# EAGLE board panel-icu-scu (EAGLE 9.3.2)
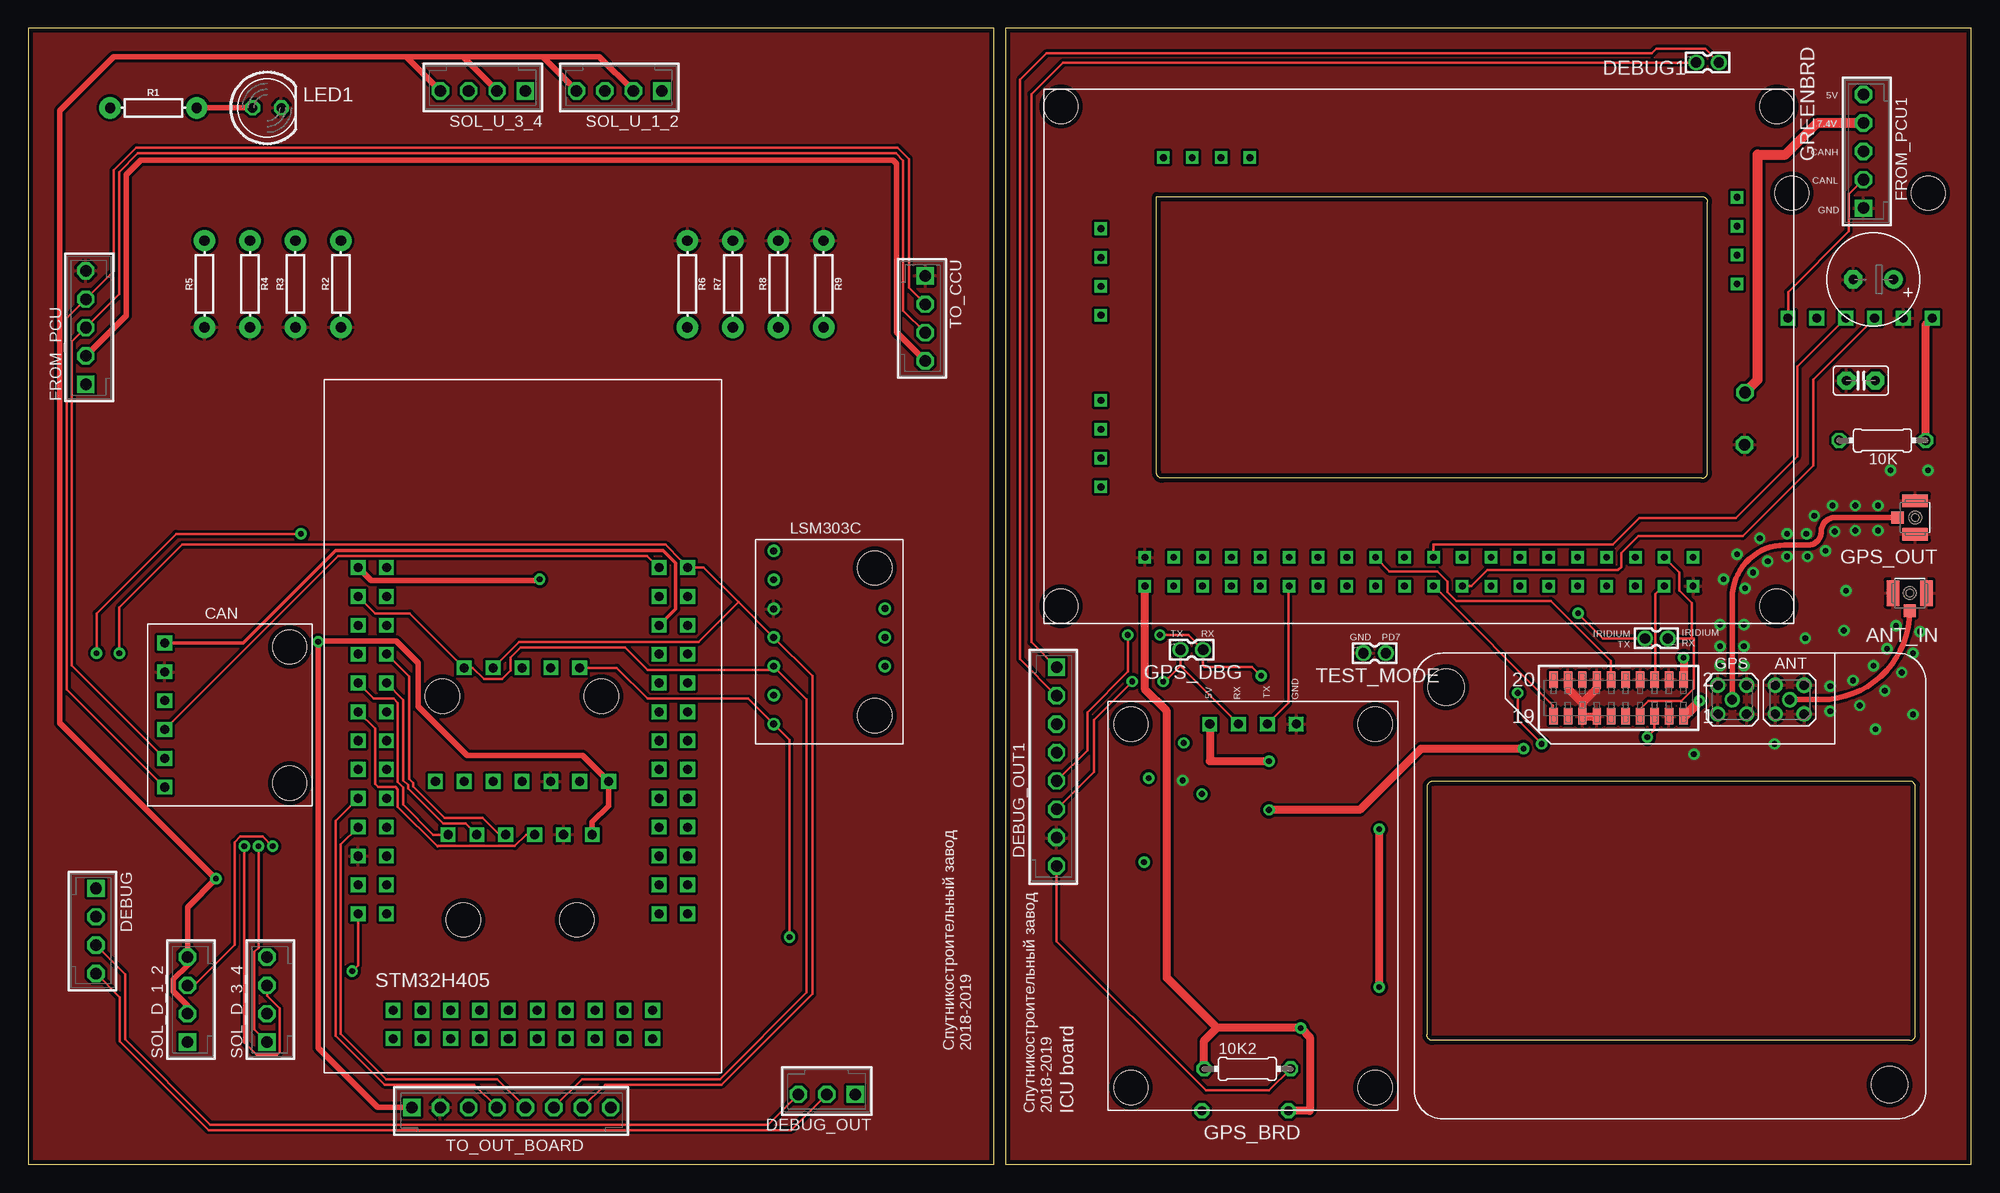
[diagram p0: board, top side]
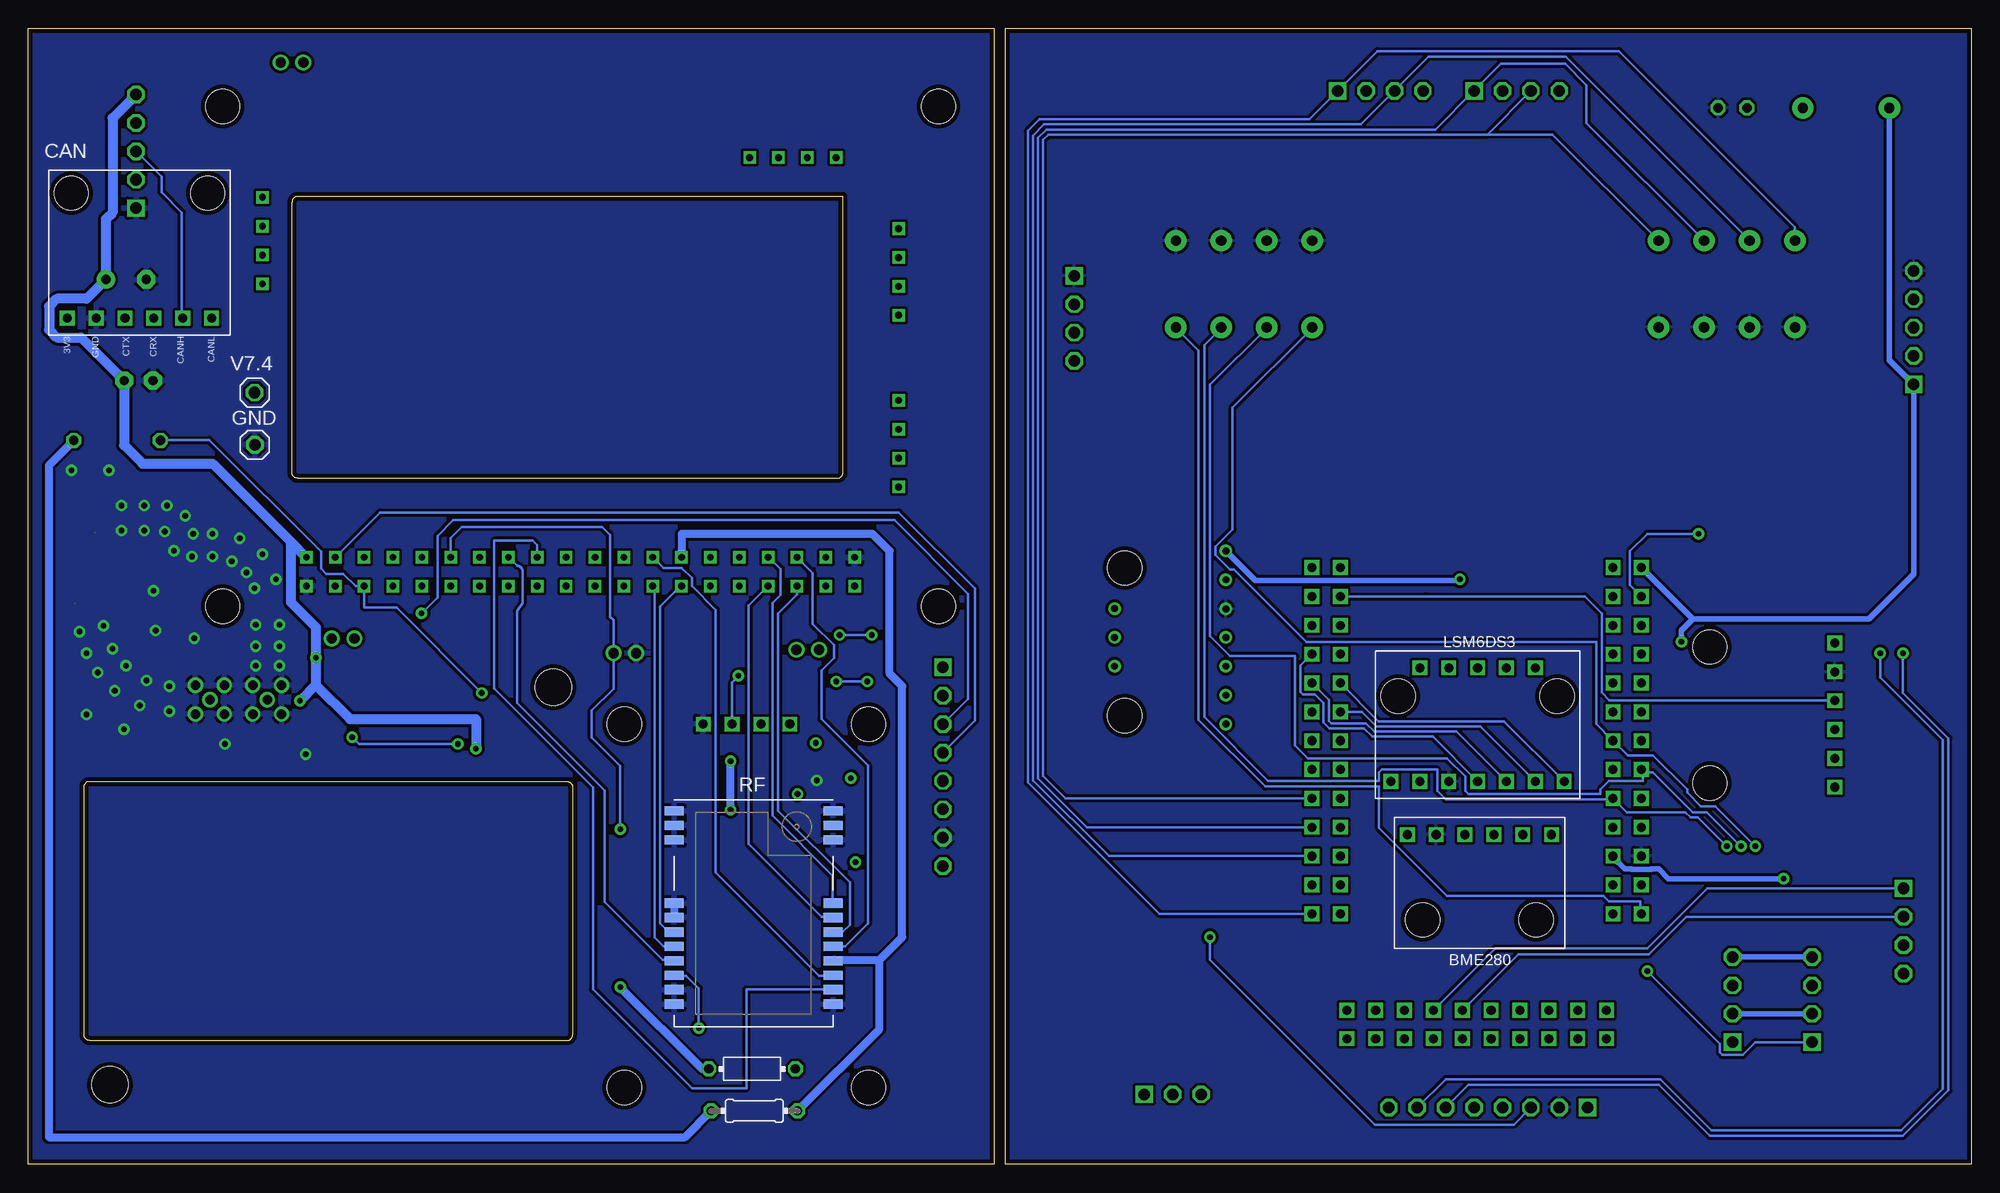
[diagram p1: board, bottom side, seen from below]

Size 171 x 100 mm. Coordinates in mm from the lower left corner, seen from the top.
Outline: 0,0 85,0 85,100 0,100 0,0
Outline: 86,0 171,0 171,100 86,100 86,0
Outline: 99.3,85.2 147.3,85.2 arc-90 147.8,84.7 147.8,60.9 arc-90 147.3,60.4 99.8,60.4 arc-90 99.3,60.9 99.3,85.2
Outline: 123.1,33.2 123.1,11.4 arc90 123.6,10.9 165.6,10.9 arc90 166.1,11.4 166.1,33.4 165.8,33.7 123.6,33.7 arc90 123.1,33.2
Copper layers (1*16): Top 0.035mm / dielectric 1mm / Bottom 0.035mm
Design rules "rezonit": minimum track width 0.2mm, minimum drill 0.5mm, track to track 0.25mm, track to pad 0.25mm, pad to pad 0.25mm, via to via 0.25mm, smd to smd 0.2mm, copper to edge 0.4mm, drill to drill 0.4mm, minimum pad ring 0.25mm, minimum via ring 0.25mm, stop-mask expansion 4mil, vias tented up to drill 0.6mm, thermal gap 10mil
Net classes: 0 default: width 0.2 mm, clearance 0.2 mm; 2 rf: width 0.5 mm, clearance 0.065 mm
Holes 3.2 mm at 124.8,42 163.8,7

## Footprints (pad centres in the part's own frame; a part is rotated, then mirrored left to right if it is on the bottom)
0204/7 = drill 0.813 octagon: 1 -3.81,0; 2 3.81,0
MMCX-P-P-X-ST-TH1 = drill 0.84 pad 1.3: 1 0,0; 2 -1.27,1.27; 3 -1.27,-1.27; 4 1.27,1.27; 5 1.27,-1.27
HRS_U.FL-R-SMT(01) = smd 1.1 x 2.25: 1 -1.475,0; 2 1.475,0 | smd 1.05 x 1.1: 3 0,-1.55
E3,5-8 = drill 0.813 pad 1.6: + -1.778,0 | drill 0.813 pad 1.6 octagon: - 1.778,0
C2.5-2 = drill 0.813 pad 1.6 octagon: 1 -1.27,0; 2 1.27,0
CAN = drill 0.8 square: 3V3 -5.75,6.35; CANH -5.75,-3.81; CANL -5.75,-6.35; CRX -5.75,-1.27; CTX -5.75,1.27; GND -5.75,3.81 | hole 3: 5.25,6; 5.25,-6
B4B-EH-A = drill 1.016 square: 1 -3.75,0 | drill 1.016 octagon: 2 -1.25,0; 3 1.25,0; 4 3.75,0
332-02 = drill 0.9 pad 1.27: 1 0,-1; 2 0,1
B3B-EH-A = drill 1.016 square: 1 -2.5,0 | drill 1.016 octagon: 2 0,0; 3 2.5,0
B8B-EH-A = drill 1.016 square: 1 -8.75,0 | drill 1.016 octagon: 2 -6.25,0; 3 -3.75,0; 4 -1.25,0; 5 1.25,0; 6 3.75,0; 7 6.25,0; 8 8.75,0
B5B-EH-A = drill 1.016 square: 1 -5,0 | drill 1.016 octagon: 2 -2.5,0; 3 0,0; 4 2.5,0; 5 5,0
1X01 = drill 1.016 octagon: 1 0,0
GPS = drill 0.8 square: GND -16,3.81; RX -16,-1.27; TX -16,1.27; UCC -16,-3.81 | hole 3: 16,10.75; -16,10.75; -16,-10.75; 16,-10.75
ICU = drill 0.6 square: 3V3_0 20.23,-24.13; 3V3_1 8.96,-28; 5V_0 17.69,24.13; 5V_1 -14,28; 5V_2 -17.5,-19.96; GND -8.92,28; GND_0 20.23,24.13; GND_1 17.69,-24.13; GND_2 -17.5,-22.5; GND_3 11.5,-28; PA1 20.23,-21.59; PA2 6.42,-28; PA3 3.88,-28; PA4 -11.24,-28; PA5 -8.7,-28; PA6 -6.16,-28; PA7 -3.62,-28; PA8 20.23,-3.81; PB0 20.23,13.97; PB1 17.69,13.97; PB2 20.23,16.51; PB3 17.69,16.51; PB4 20.23,19.05; PB5 17.69,19.05; PB6 20.23,21.59; PB7 17.69,21.59; PB12 17.69,-16.51; PB13 20.23,-16.51; PB14 17.69,-19.05; PB15 20.23,-19.05; PC1 -17.5,-17.42; PC2 -17.5,-14.88; PC4 17.69,-21.59; PC5 20.23,-13.97; PC7 17.69,-1.27; PC8 20.23,-1.27; PC9 17.69,-3.81; PD0 20.23,3.81; PD1 17.69,1.27; PD4 20.23,8.89; PD5 17.69,8.89; PD7 17.69,11.43; PD8 17.69,-11.43; PD9 20.23,-11.43; PD10 17.69,-13.97; PD11 20.23,11.43; PD13 17.69,6.35; PD14 20.23,6.35; PD15 17.69,3.81; PE7 20.23,1.27; PE12 17.69,-6.35; PE13 20.23,-6.35; PE14 17.69,-8.89; PE15 20.23,-8.89; SWC -6.38,28; SWD -11.46,28 | hole 3: -22,31.5; -22,-31.5; 22,-31.5; 22,31.5
LED5MM = drill 0.813 octagon: A -1.27,0; K 1.27,0
AXIAL-0.3 = drill 0.9 pad 1.88: P$1 -3.81,0; P$2 3.81,0
E22-400M22S = smd 0.813 x 1.676: P$1 -9,-6.97; P$2 -7.73,-6.97; P$3 -6.46,-6.97; P$4 -0.89,-6.97; P$5 0.38,-6.97; P$6 1.65,-6.97; P$7 2.92,-6.97; P$8 4.19,-6.97; P$9 5.46,-6.97; P$10 6.73,-6.97; P$11 8,-6.97; P$12 8,7; P$13 6.73,7; P$14 5.46,7; P$15 4.19,7; P$16 2.92,7; P$17 1.65,7; P$18 0.38,7; P$19 -0.89,7; P$20 -6.46,7; P$21 -7.73,7; P$22 -9,7
SCU = drill 0.8 square: 3.3V -12,-11.43; 5VUSB -12,11.43; +3.3V 12,8.89; GND_0 8.89,-27.5; GND_1 -12,13.97; GND_2 -14.5,-11.43; GND_3 14.5,8.89; GNDA -12,-13.97; NRST 12,-16.51; P$1 1.27,-27.5; P$3 -1.27,-25; P$4 -3.81,-25; P$5 -6.35,-25; P$6 -8.89,-25; P$7 -11.43,-25; P$8 -11.43,-27.5; P$9 -8.89,-27.5; P$10 -6.35,-27.5; P$11 -3.81,-27.5; P$12 -1.27,-27.5; P$14 6.35,-25; P$15 8.89,-25; P$17 3.81,-27.5; P$18 6.35,-27.5; P$20 11.43,-27.5; PA0 -14.5,-13.97; PA1 -14.5,-8.89; PA2 -12,-8.89; PA3 -14.5,-6.35; PA4 -12,-3.81; PA5 14.5,-6.35; PA6 14.5,-1.27; PA7 14.5,-11.43; PA8 14.5,13.97; PA9 14.5,11.43; PA10 12,6.35; PA11 12,13.97; PA12 12,11.43; PB0 12,-11.43; PB1 14.5,-16.51; PB5 14.5,1.27; PB6 12,-1.27; PB7 12,-3.81; PB8 14.5,-3.81; PB9 12,-6.35; PB10 -14.5,-1.27; PB11 -12,1.27; PB12 -12,3.81; PB13 -14.5,1.27; PB14 -14.5,3.81; PB15 -12,6.35; PC0 12,-8.89; PC1 14.5,-8.89; PC2 -14.5,-16.51; PC3 -12,-6.35; PC4 -14.5,-3.81; PC5 -12,-1.27; PC6 -14.5,6.35; PC7 -12,8.89; PC8 -14.5,8.89; PC9 -14.5,11.43; PC10 14.5,6.35; PC11 12,3.81; PC12 14.5,3.81; PC13 14.5,-13.97; PD2 12,1.27; SW-CLK 1.27,-25; SW-DAT 3.81,-25; VBAT 12,-13.97; VDD 11.43,-25; VDDA -12,-16.51; VIN -14.5,13.97
BME = drill 0.8 square: CSB 4.25,-3.81; GND 4.25,3.81; SCL 4.25,1.27; SD0 4.25,-6.35; SDA 4.25,-1.27; UCC 4.25,6.35 | hole 3: -3.25,5; -3.25,-5
LSM6DS3 = drill 0.8 square: 3V3 -5,5.08; CS -5,-5.08; GND -5,2.54; INT1 5,0; INT2 5,2.54; OCS 5,5.08; SAD -5,-7.62; SCL -5,0; SCX 5,-2.54; SDA -5,-2.54; SDX 5,-5.08; VIN -5,7.62 | hole 3: 2.5,7; 2.5,-7
LSM303C = drill 0.6: 3V3 -4.9,5.46; 5V -4.9,8; CSA -4.9,-4.7; CSM -4.9,-7.24; DRYM 4.9,0.38; GND -4.9,2.9; INTA 4.9,2.92; INTM 4.9,-2.16; SCL -4.9,0.38; SDA -4.9,-2.16 | hole 3: 4,6.5; 4,-6.5
SAMTEC-CLP-110-02-X-D = smd 0.74 x 1.47: 1 -5.715,1.613; 2 -5.715,-1.613; 3 -4.445,1.613; 4 -4.445,-1.613; 5 -3.175,1.613; 6 -3.175,-1.613; 7 -1.905,1.613; 8 -1.905,-1.613; 9 -0.635,1.613; 10 -0.635,-1.613; 11 0.635,1.613; 12 0.635,-1.613; 13 1.905,1.613; 14 1.905,-1.613; 15 3.175,1.613; 16 3.175,-1.613; 17 4.445,1.613; 18 4.445,-1.613; 19 5.715,1.613; 20 5.715,-1.613

## Placement (x,y rotation side)
10K  10K  [0204/7]  163.19,63.73 180 top
10K1  10K  [0204/7]  107.1,4.7 0 bottom
10K2  10K  [0204/7]  107.3,8.4 0 top
ANT1  MMCX-P-P-X-ST-TH1  [MMCX-P-P-X-ST-TH1]  155.03,40.91 0 top
ANT_IN  U.FL-R-SMT(01)  [HRS_U.FL-R-SMT(01)]  165.6,50.28 0 top
C1  [E3,5-8]  162.4,77.9 180 top
C2  [C2.5-2]  161.3,69 0 top
CAN  CAN  [CAN]  161.23,80.25 90 bottom
DEBUG  B4B-EH-A  [B4B-EH-A]  5.95,20.54 270 top
DEBUG1  332-02  [332-02]  147.8,97 270 top
DEBUG_OUT  B3B-EH-A  [B3B-EH-A]  70.28,6.16 180 top
DEBUG_OUT1  B8B-EH-A  [B8B-EH-A]  90.5,35 270 top
FROM_PCU  B5B-EH-A  [B5B-EH-A]  5.05,73.66 90 top
FROM_PCU1  B5B-EH-A  [B5B-EH-A]  161.52,89.18 90 top
GND  [1X01]  151.07,63.34 0 bottom
GPS1  MMCX-P-P-X-ST-TH1  [MMCX-P-P-X-ST-TH1]  149.98,40.91 0 top
GPS_BRD  GPS  [GPS]  107.79,22.75 270 top
GPS_DBG  332-02  [332-02]  102.4,45.3 270 top
GPS_OUT  U.FL-R-SMT(01)  [HRS_U.FL-R-SMT(01)]  166.08,56.94 270 top
GREENBRD  ICU  [ICU]  122.4,71.13 270 top
IRIDIUM  332-02  [332-02]  143.3,46.3 90 top
LED1  [LED5MM]  21,93 0 top
R1  150  [AXIAL-0.3]  11,93 0 top
R2  150  [AXIAL-0.3]  27.5,77.5 90 top
R3  150  [AXIAL-0.3]  23.5,77.5 90 top
R4  150  [AXIAL-0.3]  19.5,77.5 270 top
R5  150  [AXIAL-0.3]  15.5,77.5 90 top
R6  150  [AXIAL-0.3]  58,77.5 270 top
R7  150  [AXIAL-0.3]  62,77.5 90 top
R8  150  [AXIAL-0.3]  66,77.5 90 top
R9  150  [AXIAL-0.3]  70,77.5 270 top
RF  E22-400M22S  [E22-400M22S]  107.18,22.1 270 bottom
SOL_D_1_2  B4B-EH-A  [B4B-EH-A]  14,14.5 90 top
SOL_D_3_4  B4B-EH-A  [B4B-EH-A]  21,14.5 90 top
SOL_U_1_2  B4B-EH-A  [B4B-EH-A]  52,94.5 180 top
SOL_U_3_4  B4B-EH-A  [B4B-EH-A]  40,94.5 180 top
STM32H405  SCU  [SCU]  43.52,38.56 0 top
TEST_MODE  332-02  [332-02]  118.5,45 270 top
TO_CCU  B4B-EH-A  [B4B-EH-A]  78.95,74.47 270 top
TO_OUT_BOARD  B8B-EH-A  [B8B-EH-A]  42.5,5 0 top
U$2  BME  [BME]  43.28,24.77 90 bottom
U$3  LSM6DS3  [LSM6DS3]  43.44,38.71 90 bottom
U$4  LSM303C  [LSM303C]  70.5,46 0 top
U$7  CAN  [CAN]  17.74,39.55 0 top
USER_PORT1  SAMTEC-CLP-110-02-X-DJ  [SAMTEC-CLP-110-02-X-D]  139.96,41.05 180 top
V7.4  [1X01]  151.09,67.94 0 bottom

## Library data of the parts
10K 10K1 10K2 = rcl; SPICEPREFIX: R
ANT1 GPS1 = MMCX-P-P-X-ST-TH1; DESCRIPTION: Conn MMCX PL 0Hz to 6GHz 50Ohm Solder ST Thru-Hole Gold Over Nickel; DIGI-KEY_PART_NUMBER: SAM10618-ND; DIGI-KEY_PURCHASE_URL: https://www.digikey.ru/product-detail/en/samtec-inc/MMCX-P-P-H-ST-TH1/SAM10618-ND/6561612?utm_source=snapeda&utm_medium=aggregator&utm_campaign=symbol; MF: Samtec Inc.; MP: MMCX-P-P-H-ST-TH1; PACKAGE: None
ANT_IN GPS_OUT = U.FL-R-SMT_01_; DESCRIPTION: U.FL Series 6 Ghz 50 Ohm Ultra-small SMT Coaxial Cable Receptacle; DIGI-KEY_PART_NUMBER: H9161-ND; DIGI-KEY_PURCHASE_URL: https://www.digikey.ru/product-detail/en/hirose-electric-co-ltd/U.FL-R-SMT_01_/H9161-ND/513010?utm_source=snapeda&utm_medium=aggregator&utm_campaign=symbol; MF: Hirose; MP: U.FL-R-SMT_01_; PACKAGE: None
C1 = rcl; SPICEPREFIX: C
C2 = capacitor-wima
CAN GPS_BRD GREENBRD STM32H405 U$2-U$4 U$7 = bluepill
DEBUG DEBUG_OUT DEBUG_OUT1 FROM_PCU FROM_PCU1 SOL_D_1_2 SOL_D_3_4 SOL_U_1_2 SOL_U_3_4 TO_CCU TO_OUT_BOARD = con-jst-eh
DEBUG1 GPS_DBG IRIDIUM TEST_MODE = con-garry
GND V7.4 = pinhead
LED1 = led
R1-R9 = SparkFun-Resistors
RF = ebyte-radio
USER_PORT1 = SAMTEC-CLP-110-02-X-D; DESCRIPTION: .050 Tiger Claw™ Rugged Reliable Dual Wipe Socket Strip; DIGI-KEY_PART_NUMBER: CLP-110-02-L-D-K-ND; DIGI-KEY_PURCHASE_URL: https://www.digikey.ru/product-detail/en/samtec-inc/CLP-110-02-L-D-K/CLP-110-02-L-D-K-ND/6693709?utm_source=snapeda&utm_medium=aggregator&utm_campaign=symbol; MF: Samtec Inc.; MP: CLP-110-02-L-D-K; PACKAGE: None

## Nets
3.3V: 10K1.1 10K2.1 10K.1 CAN.3V3 GREENBRD.3V3_0 RF.P$9
3V3: SOL_D_1_2.2 SOL_D_1_2.4 SOL_D_3_4.2 SOL_D_3_4.4 SOL_U_1_2.2 SOL_U_1_2.4 SOL_U_3_4.2 SOL_U_3_4.4 STM32H405.3.3V
5V_CCU: FROM_PCU.2 TO_CCU.4
5V_ICU: C1.+ C2.2 FROM_PCU1.5 GPS_BRD.UCC GREENBRD.5V_0 USER_PORT1.1 USER_PORT1.2
5V_SCU: FROM_PCU.1 R1.P$1 STM32H405.VIN TO_OUT_BOARD.1 U$2.UCC U$3.VIN U$4.5V
7.4V: FROM_PCU1.4 V7.4.1
ADC_OUT_1: STM32H405.PA1 TO_OUT_BOARD.5
ADC_OUT_2: STM32H405.PA3 TO_OUT_BOARD.4
DF_CTS: USER_PORT1.11
DF_DCD: USER_PORT1.9
DF_DSR: USER_PORT1.10
DF_RI: GREENBRD.PC9 USER_PORT1.12
DF_S_RX: DEBUG_OUT1.4 GREENBRD.PB7 IRIDIUM.1 USER_PORT1.7
DF_S_TX: DEBUG_OUT1.3 GREENBRD.PB6 IRIDIUM.2 USER_PORT1.6
GND: FROM_PCU.5 LED1.K R2.P$1 R3.P$1 R4.P$2 R5.P$1 R6.P$1 R7.P$2 R8.P$2 R9.P$1 STM32H405.GND_2 TO_CCU.1 TO_OUT_BOARD.2 U$2.GND U$3.GND U$4.GND U$7.GND
GND1: ANT1.2 ANT1.3 ANT1.4 ANT1.5 ANT_IN.1 ANT_IN.2 C1.- C2.1 CAN.GND DEBUG_OUT1.7 FROM_PCU1.1 GND.1 GPS1.2 GPS1.3 GPS1.4 GPS1.5 GPS_BRD.GND GPS_OUT.1 GPS_OUT.2 GREENBRD.GND_0 GREENBRD.GND_1 RF.P$1 RF.P$2 RF.P$3 RF.P$4 RF.P$5 RF.P$10 RF.P$11 RF.P$12 RF.P$20 RF.P$22 TEST_MODE.1 USER_PORT1.3 USER_PORT1.4 USER_PORT1.8 USER_PORT1.13 USER_PORT1.14 USER_PORT1.15 USER_PORT1.18
MAG_CS: TO_OUT_BOARD.3 U$3.OCS U$4.CSM
MISO_2: STM32H405.PB14 U$2.SD0
MISO_3: STM32H405.PC11 U$3.SAD
MOSI_2: STM32H405.PB15 U$2.SDA
MOSI_3: STM32H405.PC12 U$3.SDA
N$1: GREENBRD.PB14 RF.P$16
N$2: GREENBRD.PB12 RF.P$19
N$3: GREENBRD.PE15 RF.P$6
N$4 [rf]: ANT1.1 ANT_IN.3
N$5 [rf]: GPS1.1 GPS_OUT.3
N$6: STM32H405.PA11 U$7.CRX
N$7: STM32H405.PA12 U$7.CTX
N$8: GREENBRD.PB13 RF.P$18
N$9: CAN.CANL FROM_PCU1.2
N$10: CAN.CRX GREENBRD.PD1
N$11: CAN.CANH FROM_PCU1.3
N$12: GREENBRD.PD15 RF.P$13
N$13: GREENBRD.PD13 RF.P$8
N$14: CAN.CTX GREENBRD.PD0
N$15: GREENBRD.PB15 RF.P$17
N$16: STM32H405.+3.3V U$7.3V3
N$17: GREENBRD.PE12 RF.P$14
N$18: 10K1.2 GREENBRD.PE14 RF.P$15
N$19: LED1.A R1.P$2
N$22: DEBUG.1 STM32H405.SW-DAT
N$23: FROM_PCU.3 TO_CCU.3 U$7.CANH
N$24: DEBUG.2 STM32H405.SW-CLK
N$25: FROM_PCU.4 TO_CCU.2 U$7.CANL
N$26: DEBUG.3 DEBUG_OUT.3
N$27: DEBUG.4 DEBUG_OUT.2
N$30: GREENBRD.PE13 RF.P$7
NETWORK_AVAILABLE: GREENBRD.PE7 USER_PORT1.19
NSS_2: STM32H405.PB12 U$2.CSB
NSS_3: STM32H405.PD2 U$3.CS
ON_OFF: 10K.2 GREENBRD.PB4 USER_PORT1.5
PD7: 10K2.2 DEBUG_OUT1.8 GREENBRD.PD7 TEST_MODE.2
RESERVED_1: USER_PORT1.16
RESERVED_2\: USER_PORT1.17
RX_GPS: DEBUG_OUT1.6 GPS_BRD.RX GPS_DBG.1
SCK_2: STM32H405.PB13 U$2.SCL
SCK_3: STM32H405.PC10 U$3.SCL
SCL3: STM32H405.PA8 TO_OUT_BOARD.7 U$3.SCX U$4.SCL
SDA3: STM32H405.PC9 TO_OUT_BOARD.6 U$3.SDX U$4.SDA
SOL_D_1: R9.P$2 SOL_D_1_2.1 STM32H405.PC2
SOL_D_2: R8.P$1 SOL_D_1_2.3 STM32H405.PC3
SOL_D_3: R7.P$1 SOL_D_3_4.1 STM32H405.PC4
SOL_D_4: R6.P$2 SOL_D_3_4.3 STM32H405.PC5
SOL_U_1: R5.P$2 SOL_U_1_2.1 STM32H405.PB1
SOL_U_2: R4.P$1 SOL_U_1_2.3 STM32H405.PA7
SOL_U_3: R3.P$2 SOL_U_3_4.1 STM32H405.PC1
SOL_U_4: R2.P$2 SOL_U_3_4.3 STM32H405.PA5
SUPPLY_OUT: USER_PORT1.20
SWC: DEBUG1.2 DEBUG_OUT1.2
SWD: DEBUG1.1 DEBUG_OUT1.1
TX_GPS: DEBUG_OUT1.5 GPS_BRD.TX GPS_DBG.2 GREENBRD.PD9

## Tracks (layer width: path | path; a pad name or v marks a point on that pad's centre or on a via)
3.3V  (via drill 0.5)
  Top 0.2: 98.3,50.9 GREENBRD.3V3_0
  Top 0.7: 104.6,12 v112,12 112.8,11.2 112.8,4.7 10K1.1 | 104.6,12 100.2,16.4 100.2,39.9 98.3,41.8 98.3,50.9 | 10K2.1 103.49,10.89 104.6,12 | 10K.1 167,73.92 CAN.3V3
  Bottom 0.2: v112,12 112,15.5 113.1,16.6 114.1,16.6 RF.P$9
  Bottom 0.7: 10K.1 169.2,61.53 169.2,2.4 113.21,2.4 10K1.1
3V3  (via drill 0.5)
  Top 0.5: 33.25,97.5 7.5,97.5 2.77,92.78 2.77,38.87 v16.5,25.14 14,22.64 SOL_D_1_2.4 14,17.54 12.74,16.27 12.74,15.23 14,13.96 SOL_D_1_2.2 | 33.25,97.5 38.25,97.5 | 38.25,97.5 45.25,97.5 | 45.25,97.5 50.25,97.5 SOL_U_1_2.2 | SOL_U_3_4.4 33.25,97.5 | SOL_U_3_4.2 38.25,97.5 | SOL_U_1_2.4 45.25,97.5
  Bottom 0.5: v16.5,25.14 26.64,25.14 27.5,26 28.14,26 28.16,25.98 29.88,25.98 29.9,26 30.5,26 31.52,27.02 STM32H405.3.3V | SOL_D_1_2.4 SOL_D_3_4.4 | SOL_D_1_2.2 SOL_D_3_4.2
5V_CCU
  Top 0.5: FROM_PCU.2 8.6,74.71 8.6,87.11 9.88,88.4 76.1,88.4 76.4,88.1 76.4,73.27 TO_CCU.4
5V_ICU  (via drill 0.5)
  Top 0.2: 145.7,42.7 USER_PORT1.2 | 104,38.7 GPS_BRD.UCC
  Top 0.7: v145.7,44.6 145.7,42.7 | v109.2,35.5 104,35.5 104,38.7 | v131.6,36.6 122.6,36.6 117.2,31.2 v109.2,31.2 | 147,40.7 v147.1,40.8 | 145.74,39.44 USER_PORT1.1
  Top 0.9: v147.1,40.8 145.74,39.44
  Bottom 0.7: v109.2,31.2 v109.2,35.5
  Bottom 0.9: FROM_PCU1.5 163.6,92.1 163.6,83.8 164.18,83.22 C1.+ 165.87,76.2 168.5,76.2 169.18,75.52 169.18,73.48 168.5,72.8 166.37,72.8 C2.2 162.57,63.3 160.95,61.68 154.79,61.68 147.88,54.77 | v131.6,36.6 131.6,39.2 142.7,39.2 145.7,42.2 | GREENBRD.5V_0 146.55,53.44 147.88,54.77 | 145.7,42.2 v145.7,44.6 145.7,47.28 147.88,49.46 147.88,54.77 | 145.7,42.2 v147.1,40.8
5V_SCU  (via drill 0.5)
  Top 0.2: v45,51.5 44.88,51.38
  Top 0.5: U$2.UCC 49.63,30.13 51.06,31.56 U$3.VIN 48.77,36 38.61,36 34.29,40.32 34.29,44.15 32.38,46.06 25.56,46.06 v25.5,46 25.5,10.25 30.75,5 TO_OUT_BOARD.1 | STM32H405.VIN 30.17,51.38 44.88,51.38
  Bottom 0.5: R1.P$1 7.19,70.8 FROM_PCU.1 5.05,51.95 9,48 24.49,48 | 24.49,48 STM32H405.VIN | 24.49,48 25.5,46.99 v25.5,46 | U$4.5V 62.98,51.38 45.12,51.38 v45,51.5
7.4V
  Top 0.9: V7.4.1 152.19,69.04 152.19,88.9 154.66,88.9 157.29,91.53 arc-45 157.65,91.68 FROM_PCU1.4
ADC_OUT_1
  Top 0.2: STM32H405.PA1 27.5,28.15 27.5,11.5 31.5,7.5 41.25,7.5 TO_OUT_BOARD.5
ADC_OUT_2
  Top 0.2: STM32H405.PA3 27.05,30.24 27.05,11.31 31.36,7 39.25,7 TO_OUT_BOARD.4
DF_RI
  Top 0.2: USER_PORT1.12 139.3,42.7 139.3,44.3 134,49.6 125.7,49.6 124.9,50.4 124.9,51.3 124,52.2 119.8,52.2 118.6,53.4 GREENBRD.PC9
DF_S_RX
  Top 0.2: 146.4,46.3 146.4,49.4 145.3,50.5 145.3,52.1 144,53.4 GREENBRD.PB7 | USER_PORT1.7 141.9,39.5 141.9,40.1 142.6,40.8 145.5,40.8 146.6,41.9 146.6,46.3 146.4,46.3 | IRIDIUM.1 146.4,46.3
  Bottom 0.2: GREENBRD.PB7 140.03,57.4 94.41,57.4 87.68,50.68 87.68,39.07 DEBUG_OUT1.4
DF_S_TX  (via drill 0.5)
  Top 0.2: 143.2,45.4 143.2,50.2 143.9,50.9 GREENBRD.PB6 | 143.2,45.4 143.2,42.7 USER_PORT1.6 | 143.2,45.4 IRIDIUM.2 138.6,46.3 v136.4,48.5
  Bottom 0.2: v136.4,48.5 135,49.9 135,55.3 133.6,56.7 94.77,56.7 88.28,50.21 88.28,40.97 DEBUG_OUT1.3
GND
  pour Bottom: 0,100 0,0 85,0 85,100
  pour Top: 0,100 0,0 85,0 85,100
GND1  (via drill 0.5)
  Top 0.2: USER_PORT1.15
  Top 0.7: USER_PORT1.15 USER_PORT1.13 | USER_PORT1.18 135.51,41.88 136.78,40.62 | 136.78,40.62 USER_PORT1.15 | USER_PORT1.14 138.06,41.89 136.78,40.62
  Bottom 0.7: RF.P$4 RF.P$5
  other vias: 153.1,53.1 160.8,58 160.8,55.8 156.5,55.5 156.6,53.5 157.2,57.1 154.8,53.5 150.4,53.7 152.4,55.1 151.1,50.7 149.2,51.5 151.8,52.1 154.8,55.5 158.2,54 166.5,46.9 164.4,47.4 162.8,55.8 158.8,58 159,55.7 162.8,58 167.2,61.1 101.6,33.8 148.9,47.5 151,47.5 151,45.6 148.9,45.6 148.9,43.9 151,43.9 165.9,45 163.6,45.4 164.9,43.3 162.4,43.9 163.4,41.7 160.6,42.6 158.6,42.1 158.6,39.9 161.2,40.4 160,50.5 156.4,46.3 159.8,47 163.9,61.1 153.7,37 162.6,38.3 165.9,39.6 146.6,36.1
  pour Top: 86,100 171,100 171,0 86,0
  pour Bottom: 86,100 171,100 171,0 86,0
MAG_CS  (via drill 0.5)
  Top 0.2: v67,20 67,37.36 U$4.CSM 63.36,41 54.5,41 51.79,43.71 U$3.OCS
  Bottom 0.2: TO_OUT_BOARD.3 40.25,3.5 52.5,3.5 67,18 v67,20
MISO_2
  Top 0.2: U$2.SD0 35.62,29.02 32.97,31.67 32.97,33.19 32.52,33.64 32.52,40.62 32.15,41 30.39,41 STM32H405.PB14
MISO_3
  Bottom 0.2: STM32H405.PC11 52.15,39 41.11,39 U$3.SAD
MOSI_2
  Top 0.2: U$2.SDA 41.48,29.02 40,30.5 36.66,30.5 33.87,33.29 33.87,33.56 33.5,33.93 33.5,42.93 STM32H405.PB15
MOSI_3
  Bottom 0.2: U$3.SDA 45.29,38.1 52.52,38.1 53.25,38.83 56.31,38.83 56.52,39.03 56.52,40.87 STM32H405.PC12
N$1
  Bottom 0.2: RF.P$16 100.1,19.2 99.1,19.2 97.1,21.2 97.1,35.1 101.2,39.2 101.2,43.48 100.1,44.58 100.1,45.72 101.96,47.58 101.96,52.05 GREENBRD.PB14
N$2
  Bottom 0.2: RF.P$19 100.2,23 100.2,25.4 105.5,30.7 105.5,49.4 104.8,50.1 104.8,52.4 105.8,53.4 GREENBRD.PB12
N$3
  Bottom 0.2: RF.P$6 114.2,20.5 114.7,20.5 115.4,21.2 115.4,49.1 113.6,50.9 GREENBRD.PE15
N$4
  Top 0.5: ANT1.1 157.78,40.91 arc90 ANT_IN.3
N$5
  Top 0.5: GPS1.1 149.98,49.88 arc-90 154.6,54.5 156.6,54.5 arc90 157.8,55.7 arc-90 159.04,56.94 GPS_OUT.3
N$6
  Top 0.2: STM32H405.PA11 55.35,52.65 54.45,53.55 27.26,53.55 U$7.CRX
N$7
  Bottom 0.2: STM32H405.PA12 48.01,49.99 48,50 34,50 32.5,48.5 32.5,48.27 32.52,48.24 32.52,41.52 31.83,40.83 28.23,40.83 28.21,40.82 U$7.CTX
N$8
  Bottom 0.2: RF.P$18 100.2,21.8 101.2,21.8 107.6,28.2 107.6,49.19 GREENBRD.PB13
N$9
  Top 0.2: CAN.CANL 154.9,74.5 154.9,76.8 160.23,82.13 160.23,85.39 FROM_PCU1.2
N$10
  Top 0.2: GREENBRD.PD1 123.67,54.57 139.47,54.57 141.8,56.9 150.3,56.9 155.7,62.3 155.7,70.24 CAN.CRX
N$11
  Bottom 0.2: CAN.CANH 157.5,74.5 157.5,83.8 159.29,85.59 159.29,86.95 FROM_PCU1.3
N$12
  Bottom 0.2: RF.P$13 100.21,15.4 107.8,15.4 107.8,6.7 112.6,6.7 121.3,15.4 121.3,33.2 130,41.9 130,54.9 126.6,54.9 126.21,54.51 GREENBRD.PD15
N$13
  Bottom 0.2: RF.P$8 114.2,18 115.2,18 120.3,23.1 120.3,32.9 128,40.6 128,48.7 127.5,49.4 127.5,52.2 arc-90 128,52.7 128.7,53.4 GREENBRD.PD13
N$14
  Top 0.2: GREENBRD.PD0 127,50.9 128.4,52.3 139.9,52.3 140.2,52.6 140.2,53.8 141.7,55.3 150.9,55.3 157.1,61.5 157.1,69.1 CAN.CTX
N$15
  Bottom 0.2: GREENBRD.PB15 103.35,50.15 105,48.5 105,31.1 98.7,24.8 98.7,21.1 99.3,20.5 100.1,20.5 RF.P$17
N$16
  Top 0.3: STM32H405.+3.3V 56.97,48.9 56.97,52.95 55.87,54.05 27.05,54.05 18.9,45.9 U$7.3V3
N$17
  Bottom 0.2: RF.P$14 100.22,16.6 101.4,16.6 110.5,25.7 110.5,48.8 112.6,50.9 112.6,51.6 113.5,52.5 115.1,52.5 116,53.4 GREENBRD.PE12
N$18
  Bottom 0.2: RF.P$15
  Bottom 0.7: RF.P$15 100.08,18 96.1,18 | GREENBRD.PE14 113.5,55.5 96.7,55.5 95.2,54 95.2,43.2 94.1,42.1 94.1,20 96.1,18 | 96.1,18 96.1,11.89 10K1.2
N$19
  Top 0.5: R1.P$2 LED1.A
N$20  (via drill 0.5)
  other vias: 103.3,32.6
N$21  (via drill 0.5)
  other vias: 98.6,34
N$22
  Bottom 0.2: STM32H405.SW-DAT 41.89,19 28.5,19 23.21,24.29 DEBUG.1
N$23
  Top 0.2: TO_CCU.3 77,75.17 77,88.36 76.36,89 9.64,89 8,87.36 8,76.61 FROM_PCU.3 3.83,72.44 3.83,43.91 U$7.CANH
N$24
  Bottom 0.2: STM32H405.SW-CLK 39.85,18.5 28.36,18.5 25.07,21.79 DEBUG.2
N$25
  Top 0.2: TO_CCU.2 77.5,77.17 77.5,88.5 76.5,89.5 9.5,89.5 7.5,87.5 7.5,78.61 FROM_PCU.4 3.38,74.48 3.38,41.81 U$7.CANL
N$26
  Top 0.2: DEBUG_OUT.3 65.12,3.5 16,3.5 8.5,11 8.5,16.74 DEBUG.3
N$27
  Top 0.2: DEBUG_OUT.2 67.12,3 15.86,3 8.05,10.81 8.05,14.69 DEBUG.4
N$28  (via drill 0.5)
  other vias: 101.7,37.1
N$29  (via drill 0.5)
  other vias: 98.2,26.6
N$30
  Bottom 0.2: RF.P$7 114.2,19.2 115.1,19.2 115.9,20 115.9,50.8 115.95,50.8 GREENBRD.PE13
NETWORK_AVAILABLE
  Top 0.2: USER_PORT1.19 134.2,39.5 134.2,40.4 123.7,50.9 GREENBRD.PE7
NSS_2
  Top 0.2: U$2.CSB 38.47,30.02 36.5,30.02 33.42,33.1 33.42,33.38 33,33.8 33,40.89 STM32H405.PB12
NSS_3
  Bottom 0.2: U$3.CS 43.2,38.55 52.34,38.55 53.62,39.83 STM32H405.PD2
ON_OFF  (via drill 0.5)
  Top 0.2: USER_PORT1.5 143.13,38.23 v142.5,37.6 | v133.2,37 131.1,39.1 v131.1,41.5
  Bottom 0.2: v142.5,37.6 141.9,37 v133.2,37 | v131.1,41.5 138.6,49 141.4,49 141.45,49.05 GREENBRD.PB4 142.2,50.9 143.29,51.99 144.77,51.99 145.24,52.46 145.24,53.94 155.08,63.78 159.33,63.78 10K.2
PD7  (via drill 0.5)
  Top 0.2: 10K2.2 109.21,6.5 103.63,6.5 90.5,19.63 DEBUG_OUT1.8
  Top 0.7: v118.9,15.6 v118.9,29.5
  Bottom 0.2: v118.9,29.5 118.9,35.06 121.41,37.56 121.41,39.94 119.5,41.84 TEST_MODE.2 119.5,47.9 119.8,48.2 119.8,55.4 120.5,56.1 132.87,56.1 133.83,55.14 GREENBRD.PD7
  Bottom 0.7: 10K2.2 111.7,8.4 v118.9,15.6
RX_GPS  (via drill 0.5)
  Top 0.2: GPS_BRD.RX 101.4,43.87 | 101.4,43.87 GPS_DBG.1 | 101.4,43.87 100.33,42.8 v99.9,42.5 | v97.17,42.5 93.8,39.13 93.8,34.55 DEBUG_OUT1.6
  Bottom 0.2: v99.9,42.5 v97.17,42.5
SCK_2
  Top 0.2: U$2.SCL 43.8,29.02 42.8,28.02 36.02,28.02 36,28 32.52,31.48 32.52,33.01 32.31,33.21 30.79,33.21 30.5,33.5 30.5,38.35 STM32H405.PB13
SCK_3
  Bottom 0.2: U$3.SCL 47.38,37.65 52.71,37.65 53.44,38.38 56.5,38.38 57.02,38.9 57.02,40.62 57.77,41.37 58.81,41.37 59.02,41.58 59.02,43.91 STM32H405.PC10
SCL3  (via drill 0.5)
  Top 0.2: v8,45 8,49 13.55,54.55 56.07,54.55 57.47,53.15 57.47,53.08 STM32H405.PA8 59.45,52.53 62.49,49.49 | TO_OUT_BOARD.7 50.75,7 61,7 69,15 69,42.98 U$4.SCL 62.49,49.49 | U$3.SCX 43.19,46 59,46 62.49,49.49
  Bottom 0.2: v8,45 8,42.86 2.5,37.36 2.5,6.64 6.14,3 22.86,3 27.36,7.5 46.25,7.5 TO_OUT_BOARD.7
SDA3  (via drill 0.5)
  Top 0.2: v24,55.5 13,55.5 6,48.5 v6,45 | TO_OUT_BOARD.6 48.75,7.5 60.86,7.5 68.5,15.14 68.5,40.94 U$4.SDA 65.26,43.5 54.5,43.5 52.5,45.5 43.33,45.5 42.44,44.61 42.44,43.45 41.7,42.71 40.1,42.71 39.1,43.71 U$3.SDX 33.57,48.5 30.51,48.5 STM32H405.PC9
  Bottom 0.2: v24,55.5 28.5,55.5 30.02,53.98 30.02,50.99 STM32H405.PC9 | v6,45 6,41.5 2,37.5 2,6.5 6,2.5 23,2.5 27.5,7 44.25,7 TO_OUT_BOARD.6
SOL_D_1  (via drill 0.5)
  Top 0.2: v28.5,17 29.02,17.52 STM32H405.PC2
  Bottom 0.2: SOL_D_1_2.1 18.98,10.75 20.09,9.64 21.91,9.64 22.11,9.84 22.11,10.61 v28.5,17 | R9.P$2 70,73.62 68,71.62 68,39.12 62.12,33.25 52.12,33.25 52.12,29.62 46.12,23.62 32.38,23.62 31.88,23.12 29.12,23.12 29.12,22.12 STM32H405.PC2
SOL_D_2  (via drill 0.5)
  Top 0.2: SOL_D_1_2.3 14.57,15.75 18.15,19.33 18.15,28.35 18.65,28.85 20.6,28.85 21.45,28 v21.5,28
  Bottom 0.2: v21.5,28 24.05,30.55 24.69,30.55 25.14,31 30.31,31 STM32H405.PC3 31.62,32.12 46.25,32.12 47,32.88 47,34.75 51.88,34.75 52.12,34.5 52.12,33.75 61.88,33.75 67.5,39.38 67.5,72.12 66,73.62 R8.P$1
SOL_D_3  (via drill 0.5)
  Top 0.2: v20.25,28 20.25,19.07 19.89,18.71 19.89,11.86 SOL_D_3_4.1
  Bottom 0.2: v20.25,28 23.25,31 24.5,31 28,34.5 28.77,34.5 STM32H405.PC4 28.88,34.5 28.88,33.75 31.88,33.75 32.62,33 32.62,32.62 44.25,32.62 44.5,32.88 44.5,34.12 46.12,35.75 58.38,35.75 59.5,36.88 59.5,44.75 65.25,44.75 67,46.5 67,68.62 62,73.62 R7.P$1
SOL_D_4  (via drill 0.5)
  Top 0.2: SOL_D_3_4.3 21,14.82 22.11,13.71 22.11,9.84 21.91,9.64 20.09,9.64 19,10.73 v19,28
  Bottom 0.2: v19,28 22.5,31.5 23.77,31.5 24.99,32.72 24.99,32.99 28,36 30.23,36 STM32H405.PC5 31.62,37.38 33,38.75 33,46 58.5,46 64.88,52.38 65.25,52.38 66.5,53.62 66.5,54.38 65,55.88 65,66.62 58,73.62 R6.P$2
SOL_U_1
  Bottom 0.2: STM32H405.PB1 71.46,22.05 83.03,33.62 83.03,90.97 82,92 58.25,92 SOL_U_1_2.1 52.25,98 31,98 15.5,82.5 R5.P$2
SOL_U_2
  Bottom 0.2: STM32H405.PA7 75.9,27.13 82.58,33.8 82.58,90.58 81.6,91.55 53.7,91.55 SOL_U_1_2.3 47.75,97.5 35.69,97.5 R4.P$1
SOL_U_3
  Bottom 0.2: STM32H405.PC1 77.81,29.67 82.12,33.99 82.12,90.38 81.4,91.1 47.15,91.1 SOL_U_3_4.1 41.38,96.88 35.7,96.88 33.84,95.02 33.84,91.66 R3.P$2
SOL_U_4
  Bottom 0.2: 42.6,90.65 81.21,90.65 81.67,90.19 81.67,34.17 79.71,32.21 STM32H405.PA5 | SOL_U_3_4.3 42.6,90.65 | R2.P$2 36.84,90.65 42.6,90.65
SWC
  Top 0.2: DEBUG1.2 147.6,98.2 143.3,98.2 142.9,97.8 89.61,97.8 87.28,95.48 87.28,44.47 DEBUG_OUT1.2
SWD
  Top 0.2: DEBUG1.1 91.07,97 88.28,94.21 88.28,45.97 DEBUG_OUT1.1
TX_GPS  (via drill 0.5)
  Top 0.2: GREENBRD.PD9 110.9,50.9 110.9,40.6 109.1,38.8 GPS_BRD.TX | v108.5,43 107.7,43.8 103.5,43.8 103.4,43.9 GPS_DBG.2 102.1,46.6 v99.6,46.6 | v96.77,46.6 96.77,43.37 93.2,39.8 93.2,36.45 DEBUG_OUT1.5
  Bottom 0.2: GPS_BRD.TX 109.06,42.44 v108.5,43 | v99.6,46.6 v96.77,46.6

## Text on the board
tPlace: 5V | 7.4V | CANH | CANL | GND | 10K | LSM303C | CAN | IRIDIUM / TX | TX | RX | GND | PD7 | IRIDIUM / RX | GPS | ANT | 5V | RX | TX | GND | Спутникостроительный завод / 2018-2019 | Спутникостроительный завод / 2018-2019 | ICU board
bPlace: CANL | CANH | CRX | CTX | GND | 3V3 | LSM6DS3 | BME280